# Altium PCB PCB_tms320f28069.pcbdoc (part 2 of 2)
Units mil, origin at the board's own origin, x right, y up, seen from the top; angles counter-clockwise.
Board outline 7604.36 x 4553.97 mil, 2 copper layers (Top Layer, Bottom Layer); 149 components, 214 nets, 843 pads, 168 vias.
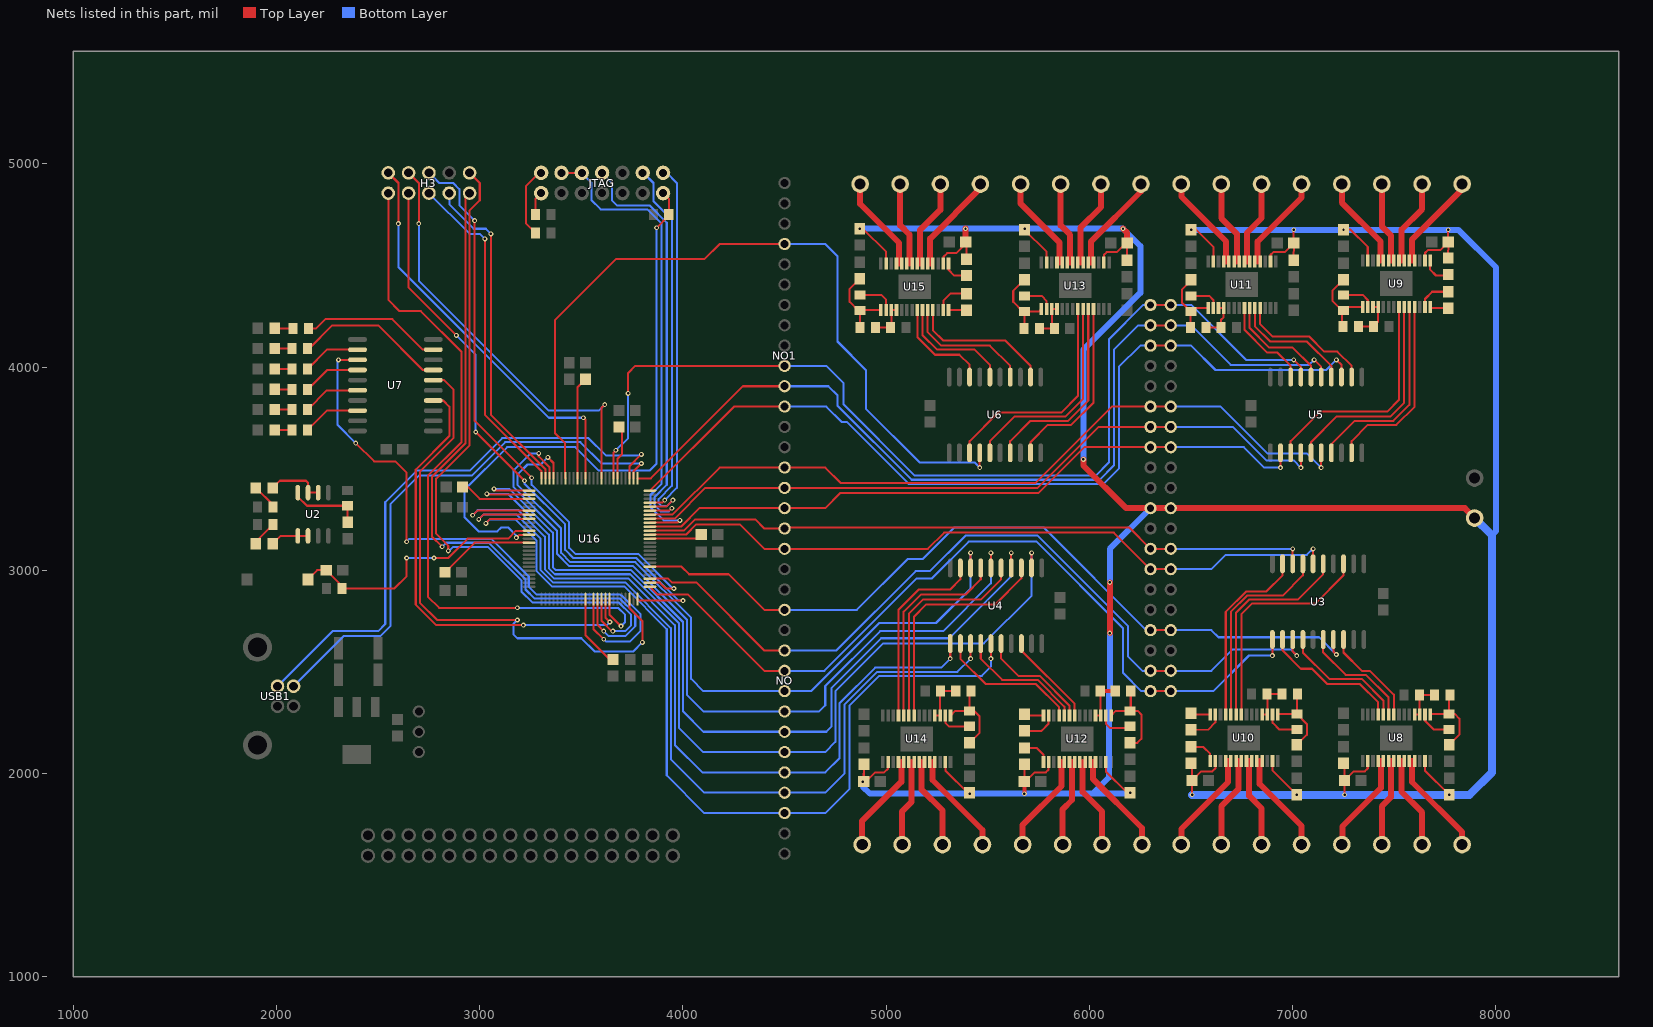
[diagram p2: the nets of this part, all layers, seen from the top]

## Via types
v1: diameter 24, hole 12, Top Layer to Bottom Layer, tented both sides, 168 vias

## Nets (pads, with @x,y where several pads share a name; then routed paths per layer and width w, separated by ;. In a path a pad name is that pad's centre, name@x,y a point inside that pad or via, vN(x,y) a via of type N, cw(c..) or ccw(c..) an arc to the next point about the centre after c; other vN are vias at no path point) (continued)
GPIO17: H3.6 U16.52 | length 2899.2
  Top Layer w10: v1(2975.16,4720.67) 2975.16,3735.67 v1(3255.16,3455.67) ; U16.52@3837.4,2939.13 3886.7,2939.13 3915.16,2910.67 v1(3955.16,2910.67)
  Bottom Layer w10: H3.6@2750.16,4955.67 2800.16,4905.67 2870.16,4905.67 2900.16,4875.67 2900.16,4795.67 v1(2975.16,4720.67) ; v1(3255.16,3455.67) 3255.16,3420.67 3440.16,3235.67 3440.16,3110.67 3470.16,3080.67 3780.16,3080.67 3950.16,2910.67 v1(3955.16,2910.67)
GPIO18: NO.8 pad.22 pad.32 U3.11 U16.51 | length 4081.8
  Top Layer w10: U16.51@3837.36,2919.47 3876.16,2880.67 4025.16,2880.67 4400.16,2505.67 NO.8@4500.16,2505.67 ; pad.22@6300.16,2405.67 pad.32@6400.16,2405.67 ; v1(6900.16,2580.67) U3.11@6900.16,2659.45
  Bottom Layer w10: NO.8@4500.16,2505.67 4695.16,2505.67 5150.16,2960.67 5225.16,2960.67 5405.16,3140.67 5740.16,3140.67 6165.16,2715.67 6165.16,2495.67 6255.16,2405.67 pad.22@6300.16,2405.67 ; pad.32@6400.16,2405.67 6610.16,2405.67 6785.16,2580.67 v1(6900.16,2580.67)
GPIO19: NO.2 pad.17 pad.38 U3.6 U16.64 | length 3556.2
  Top Layer w10: U16.64@3837.36,3175.37 4014.86,3175.37 4065.16,3225.67 4280.16,3225.67 4400.16,3105.67 NO.2@4500.16,3105.67 5205.16,3105.67 5285.16,3185.67 6120.16,3185.67 pad.17@6300.16,3005.67 pad.38@6400.16,3005.67 ; U3.6@7100.16,3031.89 v1(7100.16,3105.67)
  Bottom Layer w10: pad.38@6400.16,3005.67 6600.16,3005.67 6670.16,3075.67 7070.16,3075.67 v1(7100.16,3105.67)
GPIO20: NO.13 U4.11 U16.6 | length 4105.1
  Top Layer w10: v1(2965.16,3270.67) 2987.96,3293.47 U16.6@3242.92,3293.47 ; v1(5315.16,2565.67) U4.11@5315.16,2659.45
  Bottom Layer w10: v1(2965.16,3270.67) 2990.16,3295.67 3190.16,3295.67 3320.16,3165.67 3320.16,3005.67 3365.16,2960.67 3730.16,2960.67 3960.16,2730.67 3960.16,2140.67 4095.16,2005.67 NO.13@4500.16,2005.67 4700.16,2005.67 4770.16,2075.67 4770.16,2345.67 4945.16,2520.67 5270.16,2520.67 v1(5315.16,2565.67)
GPIO21: NO.14 U4.13 U16.7 | length 4290.1
  Top Layer w10: v1(2995.16,3250.67) 3018.27,3273.78 U16.7@3242.92,3273.78 ; v1(5415.16,2565.67) U4.13@5415.16,2659.45
  Bottom Layer w10: v1(2995.16,3250.67) 3020.16,3275.67 3180.16,3275.67 3300.16,3155.67 3300.16,3000.67 3360.16,2940.67 3715.16,2940.67 3940.16,2715.67 3940.16,2070.67 4105.16,1905.67 NO.14@4500.16,1905.67 4700.16,1905.67 4795.16,2000.67 4795.16,2340.67 4955.16,2500.67 5350.16,2500.67 v1(5415.16,2565.67)
GPIO22: NO.10 U4.6 U16.98 | length 4017.2
  Top Layer w10: v1(3290.16,3575.67) 3290.16,3560.67 3343.3,3507.52 U16.98@3343.31,3452.91 ; U4.6@5515.16,3011.89 v1(5515.16,3085.67)
  Bottom Layer w10: v1(3290.16,3575.67) 3250.16,3575.67 3165.16,3490.67 3165.16,3410.67 3380.16,3195.67 3380.16,3080.67 3440.16,3020.67 3755.16,3020.67 4020.16,2755.67 4020.16,2385.67 4100.16,2305.67 NO.10@4500.16,2305.67 4670.16,2305.67 4700.16,2335.67 4700.16,2430.67 4970.16,2700.67 5280.16,2700.67 5515.16,2935.67 v1(5515.16,3085.67)
GPIO23: NO.12 U4.2 U16.2 | length 4542.7
  Top Layer w10: v1(3035.16,3375.67) 3038.61,3372.21 U16.2@3242.92,3372.21 ; U4.2@5715.16,3031.89 v1(5715.16,3085.67)
  Bottom Layer w10: v1(3035.16,3375.67) 3140.16,3375.67 3340.16,3175.67 3340.16,3010.67 3370.16,2980.67 3740.16,2980.67 3980.16,2740.67 3980.16,2225.67 4100.16,2105.67 NO.12@4500.16,2105.67 4700.16,2105.67 4750.16,2155.67 4750.16,2405.67 4985.16,2640.67 5480.16,2640.67 5715.16,2875.67 v1(5715.16,3085.67)
GPIO24: NO.9 U4.8 U16.97 | length 3703.9
  Top Layer w10: v1(3335.16,3555.67) 3362.96,3527.87 U16.97@3362.99,3452.91 ; U4.8@5415.16,3011.89 v1(5415.16,3085.67)
  Bottom Layer w10: v1(3335.16,3555.67) 3300.16,3520.67 3235.16,3520.67 3185.16,3470.67 3185.16,3420.67 3400.16,3205.67 3400.16,3085.67 3445.16,3040.67 3765.16,3040.67 4040.16,2765.67 4040.16,2465.67 4100.16,2405.67 NO.9@4500.16,2405.67 4630.16,2405.67 4965.16,2740.67 5245.16,2740.67 5415.16,2910.67 v1(5415.16,3085.67)
GPIO25: U7.13 U16.39 | length 3039.6
  Top Layer w10: v1(2305.16,4035.67) U7.13@2398.94,4035.67 ; v1(2390.16,3625.67) 2480.16,3535.67 2585.16,3535.67 2640.16,3480.67 v1(2640.16,3140.67) ; U16.39@3559.85,2858.43 3559.85,2710.98 v1(3610.16,2660.67)
  Bottom Layer w10: v1(2305.16,4035.67) 2300.16,4030.67 2300.16,3715.67 v1(2390.16,3625.67) ; v1(2640.16,3140.67) 2654.16,3154.67 3056.16,3154.67 3241.16,2969.67 3241.16,2919.67 3280.16,2880.67 3690.76,2880.67 3695.76,2875.67 3700.16,2875.67 3790.16,2785.67 3790.16,2700.67 3740.16,2650.67 3620.16,2650.67 v1(3610.16,2660.67)
GPIO28: H3.3 U16.50 | length 2988.3
  Top Layer w10: H3.3@2650.16,4855.67 2650.16,4390.67 v1(2885.16,4155.67) ; v1(2980.16,3680.67) v1(3220.16,3440.67) ; U16.50@3776.38,2858.43 3776.38,2851.89 3777.6,2850.67 v1(4000.16,2850.67)
  Bottom Layer w10: v1(2885.16,4155.67) 2980.16,4060.67 v1(2980.16,3680.67) ; v1(3220.16,3440.67) 3220.16,3425.67 3420.16,3225.67 3420.16,3100.67 3460.16,3060.67 3770.16,3060.67 3980.16,2850.67 v1(4000.16,2850.67)
GPIO29: H3.1 U16.43 | length 3490.7
  Top Layer w10: H3.1@2550.16,4855.67 2550.16,4330.67 2605.16,4275.67 2710.16,4275.67 2910.16,4075.67 2910.16,3630.67 2745.16,3465.67 2745.16,2870.67 2800.16,2815.67 v1(3185.16,2815.67) ; U16.43@3638.59,2858.43 3638.59,2782.24 v1(3695.16,2725.67)
  Bottom Layer w10: v1(3185.16,2815.67) 3680.16,2815.67 3715.16,2780.67 3715.16,2745.67 v1(3695.16,2725.67)
GPIO30: H3.10 U16.41 | length 3410.2
  Top Layer w10: v1(2845.16,3095.67) 2845.16,3120.67 2785.16,3180.67 2785.16,3450.67 2950.16,3615.67 2950.16,4770.67 3000.16,4820.67 3000.16,4905.67 H3.10@2950.16,4955.67 ; U16.41@3599.26,2858.47 3599.26,2751.57 3650.16,2700.67 v1(3655.16,2700.67)
  Bottom Layer w10: v1(2845.16,3095.67) 2850.16,3095.67 2870.16,3115.67 3040.16,3115.67 3205.16,2950.67 3205.16,2895.67 3260.16,2840.67 3685.16,2840.67 3745.16,2780.67 3745.16,2730.67 3715.16,2700.67 v1(3655.16,2700.67)
GPIO31: H3.9 U16.40 | length 3386.4
  Top Layer w10: v1(2815.16,3115.67) 2765.16,3165.67 2765.16,3460.67 2930.16,3625.67 2930.16,4835.67 H3.9@2950.16,4855.67 ; U16.40@3579.53,2858.43 3579.53,2731.3 v1(3610.16,2700.67)
  Bottom Layer w10: v1(2815.16,3115.67) 2835.06,3135.67 3045.16,3135.67 3225.16,2955.67 3225.16,2905.67 3270.16,2860.67 3690.16,2860.67 3765.16,2785.67 3765.16,2725.67 3715.16,2675.67 3635.16,2675.67 v1(3610.16,2700.67)
GPIO32: H3.7 U16.99 | length 1634.1
  Top Layer w10: v1(3055.16,4655.67) 3055.16,3765.67 3323.66,3497.17 U16.99@3323.66,3452.87
  Bottom Layer w10: H3.7@2850.16,4855.67 2850.16,4800.67 2970.16,4680.67 3030.16,4680.67 v1(3055.16,4655.67)
GPIO33: H3.5 U16.100 | length 1661.5
  Top Layer w10: v1(3025.16,4630.67) 3025.16,3765.67 3303.96,3486.87 U16.100@3303.96,3452.87
  Bottom Layer w10: H3.5@2750.16,4855.67 2950.16,4655.67 3000.16,4655.67 v1(3025.16,4630.67)
GPIO34: NO1.15 pad.9 pad.30 U5.4 U16.68 | length 3545.4
  Top Layer w10: U16.68@3837.4,3254.1 3958.56,3254.07 4110.16,3405.67 NO1.15@4500.16,3405.67 5745.16,3405.67 6045.16,3705.67 pad.9@6300.16,3705.67 pad.30@6400.16,3705.67 ; v1(7040.16,3505.67) U5.4@7040.16,3578.39
  Bottom Layer w10: pad.30@6400.16,3705.67 6705.16,3705.67 6870.16,3540.67 7005.16,3540.67 v1(7040.16,3505.67)
GPIO39: NO1.16 pad.10 pad.31 U5.2 U16.66 | length 3378.8
  Top Layer w10: U16.66@3837.4,3214.73 3990.16,3214.73 4081.1,3305.67 NO1.16@4500.16,3305.67 4700.16,3305.67 4775.16,3380.67 5750.16,3380.67 5975.16,3605.67 pad.10@6300.16,3605.67 pad.31@6400.16,3605.67 ; v1(6940.16,3505.67) U5.2@6940.16,3578.39
  Bottom Layer w10: pad.31@6400.16,3605.67 6760.16,3605.67 6860.16,3505.67 v1(6940.16,3505.67)
GPIO40: NO1.9 pad.11 pad.24 U5.17 U16.82 | length 5035.7
  Top Layer w10: U16.82@3658.27,3452.91 3658.27,3578.78 v1(3670.16,3590.67) ; v1(3730.16,3870.67) 3730.16,3970.67 3765.16,4005.67 NO1.9@4500.16,4005.67 ; pad.11@6300.16,4305.67 pad.24@6400.16,4305.67 ; v1(7005.16,4035.67) 7040.16,4000.67 U5.17@7040.16,3950.83
  Bottom Layer w10: v1(3670.16,3590.67) 3730.16,3650.67 v1(3730.16,3870.67) ; NO1.9@4500.16,4005.67 4705.16,4005.67 4790.16,3920.67 4790.16,3815.67 5140.16,3465.67 6030.16,3465.67 6095.16,3530.67 6095.16,4135.67 6265.16,4305.67 pad.11@6300.16,4305.67 ; pad.24@6400.16,4305.67 6500.16,4305.67 6770.16,4035.67 v1(7005.16,4035.67)
GPIO41: NO1.10 pad.12 pad.25 U5.15 U16.76 | length 4575.3
  Top Layer w10: U16.76@3776.38,3452.91 3842.36,3452.87 4295.16,3905.67 NO1.10@4500.16,3905.67 ; pad.12@6300.16,4205.67 pad.25@6400.16,4205.67 ; v1(7105.16,4035.67) 7140.16,4000.67 U5.15@7140.16,3950.83
  Bottom Layer w10: NO1.10@4500.16,3905.67 4715.16,3905.67 4760.16,3860.67 4760.16,3810.67 5125.16,3445.67 6050.16,3445.67 6120.16,3515.67 6120.16,4085.67 6240.16,4205.67 pad.12@6300.16,4205.67 ; pad.25@6400.16,4205.67 6500.16,4205.67 6695.16,4010.67 7080.16,4010.67 v1(7105.16,4035.67)
GPIO42: NO.11 U4.4 U16.1 | length 4190.7
  Top Layer w10: v1(3070.16,3400.67) 3078.93,3391.89 U16.1@3242.92,3391.89 ; U4.4@5615.16,3011.89 v1(5615.16,3085.67)
  Bottom Layer w10: v1(3070.16,3400.67) 3145.16,3400.67 3360.16,3185.67 3360.16,3015.67 3375.16,3000.67 3745.16,3000.67 4000.16,2745.67 4000.16,2305.67 4100.16,2205.67 NO.11@4500.16,2205.67 4705.16,2205.67 4730.16,2230.67 4730.16,2420.67 4975.16,2665.67 5310.16,2665.67 5615.16,2970.67 v1(5615.16,3085.67)
GPIO43: NO.15 U4.15 U16.8 | length 4493.6
  Top Layer w10: v1(3030.16,3230.67) 3052.36,3252.87 U16.8@3240.91,3252.87 ; v1@5515.16,2566.89 U4.15@5515.16,2660.67
  Bottom Layer w10: v1(3030.16,3230.67) 3050.16,3250.67 3175.16,3250.67 3280.16,3145.67 3280.16,2995.67 3355.16,2920.67 3710.16,2920.67 3920.16,2710.67 3920.16,1990.67 4105.16,1805.67 NO.15@4500.16,1805.67 4700.16,1805.67 4820.16,1925.67 4820.16,2335.67 4965.16,2480.67 5470.16,2480.67 5515.16,2525.67 v1(5515.16,2565.67)
GPIO44: NO.5 pad.19 pad.35 U3.17 U16.56 | length 3972.3
  Top Layer w10: U16.56@3837.4,3017.87 3992.96,3017.87 4030.16,2980.67 4225.16,2980.67 4400.16,2805.67 NO.5@4500.16,2805.67 ; pad.19@6300.16,2705.67 pad.35@6400.16,2705.67 ; U3.17@7200.16,2659.45 7200.16,2600.67 v1(7215.16,2585.67)
  Bottom Layer w10: NO.5@4500.16,2805.67 4855.16,2805.67 5105.16,3055.67 5180.16,3055.67 5335.16,3210.67 5775.16,3210.67 6280.16,2705.67 pad.19@6300.16,2705.67 ; pad.35@6400.16,2705.67 6600.16,2705.67 6635.16,2670.67 7130.16,2670.67 v1(7215.16,2585.67)
GPIO50: U7.4 U16.42 | length 2258.8
  Top Layer w10: U7.4@2771.38,3835.67 2820.16,3835.67 2850.16,3805.67 2850.16,3660.67 2685.16,3495.67 2685.16,2830.67 2785.16,2730.67 v1(3215.16,2730.67) ; U16.42@3618.9,2858.43 3618.9,2766.93 v1(3640.16,2745.67)
  Bottom Layer w10: v1(3215.16,2730.67) 3625.16,2730.67 v1(3640.16,2745.67)
GPIO51: U7.6 U16.48 | length 2757.1
  Top Layer w10: U7.6@2771.38,3935.67 2825.16,3935.67 2870.16,3890.67 2870.16,3650.67 2705.16,3485.67 2705.16,2840.67 2790.16,2755.67 v1(3185.16,2755.67) ; U16.48@3737.05,2858.47 3737.05,2813.77 3800.16,2750.67 v1(3800.16,2645.67)
  Bottom Layer w10: v1(3185.16,2755.67) 3165.16,2735.67 3165.16,2685.67 3185.16,2665.67 3500.16,2665.67 3565.16,2600.67 3755.16,2600.67 v1(3800.16,2645.67)
GPIO52: NO.7 pad.21 pad.33 U3.13 U16.53 | length 4069.4
  Top Layer w10: U16.53@3837.4,2958.82 3927.06,2958.77 3945.16,2940.67 4065.16,2940.67 4400.16,2605.67 NO.7@4500.16,2605.67 ; pad.21@6300.16,2505.67 pad.33@6400.16,2505.67 ; U3.13@7000.16,2659.45 7000.16,2600.67 v1(7020.16,2580.67)
  Bottom Layer w10: NO.7@4500.16,2605.67 4755.16,2605.67 5145.16,2995.67 5215.16,2995.67 5390.16,3170.67 5745.16,3170.67 6190.16,2725.67 6190.16,2575.67 6260.16,2505.67 pad.21@6300.16,2505.67 ; pad.33@6400.16,2505.67 6600.16,2505.67 6705.16,2610.67 6990.16,2610.67 v1(7020.16,2580.67)
GPIO53: NO.1 pad.18 pad.39 U3.8 U16.65 | length 3326.7
  Top Layer w10: U16.65@3837.36,3195.07 4004.56,3195.07 4060.16,3250.67 4355.16,3250.67 4400.16,3205.67 NO.1@4500.16,3205.67 4500.16,3210.67 6195.16,3210.67 pad.18@6300.16,3105.67 pad.39@6400.16,3105.67 ; U3.8@7000.16,3031.89 v1(7000.16,3105.67)
  Bottom Layer w10: pad.39@6400.16,3105.67 v1(7000.16,3105.67)
GPIO54: NO1.14 pad.8 pad.29 U5.6 U16.69 | length 3782.2
  Top Layer w10: U16.69@3837.4,3273.78 3948.26,3273.77 4180.16,3505.67 NO1.14@4500.16,3505.67 4700.16,3505.67 4775.16,3430.67 5735.16,3430.67 6110.16,3805.67 pad.8@6300.16,3805.67 pad.29@6400.16,3805.67 ; v1(7140.16,3505.67) U5.6@7140.16,3578.39
  Bottom Layer w10: pad.29@6400.16,3805.67 6645.16,3805.67 6875.16,3575.67 7070.16,3575.67 v1(7140.16,3505.67)
GPIO55: NO1.11 pad.13 pad.26 U5.13 U16.75 | length 4446.8
  Top Layer w10: U16.75@3837.4,3391.89 4251.16,3805.67 NO1.11@4500.16,3805.67 ; pad.13@6300.16,4105.67 pad.26@6400.16,4105.67 ; v1(7215.16,4035.67) 7240.16,4010.67 U5.13@7240.16,3950.83
  Bottom Layer w10: NO1.11@4500.16,3805.67 4705.16,3805.67 4780.16,3730.67 4805.16,3730.67 5110.16,3425.67 6070.16,3425.67 6145.16,3500.67 6145.16,4000.67 6250.16,4105.67 pad.13@6300.16,4105.67 ; pad.26@6400.16,4105.67 6500.16,4105.67 6620.16,3985.67 7165.16,3985.67 v1(7215.16,4035.67)
GPIO56: H3.4 U16.85 | length 2112.6
  Top Layer w10: H3.4@2650.16,4955.67 2700.16,4905.67 v1(2700.16,4705.67) ; U16.85@3599.22,3452.91 3599.21,3799.73 v1(3615.16,3815.67)
  Bottom Layer w10: v1(2700.16,4705.67) 2700.16,4425.67 3340.16,3785.67 3585.16,3785.67 v1(3615.16,3815.67)
GPIO57: H3.2 U16.89 | length 2004.3
  Top Layer w10: H3.2@2550.16,4955.67 2600.16,4905.67 v1(2600.16,4705.67) ; v1(3510.16,3750.67) 3520.48,3740.35 U16.89@3520.48,3452.91
  Bottom Layer w10: v1(2600.16,4705.67) 2600.16,4490.67 3340.16,3750.67 v1(3510.16,3750.67)
GPIO58: NO1.3 U6.4 U16.94 | length 3930.3
  Top Layer w10: U16.94@3422.06,3452.87 3420.16,3454.77 3420.16,3625.67 3370.16,3675.67 3370.16,4230.67 3670.16,4530.67 4105.16,4530.67 4180.16,4605.67 NO1.3@4500.16,4605.67 ; v1(5460.16,3505.67) U6.4@5460.16,3578.39
  Bottom Layer w10: NO1.3@4500.16,4605.67 4700.16,4605.67 4760.16,4545.67 4760.16,4125.67 4900.16,3985.67 4900.16,3795.67 5165.16,3530.67 5435.16,3530.67 v1(5460.16,3505.67)
LED1_2: LED1.2 R2.2 | length 130
  Top Layer w10: LED1.2@1898.81,3405.67 1983.2,3321.28 R2.2@1983.2,3310.67
LED2_2: LED2.2 R3.2 | length 130
  Top Layer w10: LED2.2@1898.81,3130.67 1898.81,3141.28 R3.2@1983.2,3225.67
LED3_1: LED3.1 R7.1 | length 85.6
  Top Layer w10: LED3.1@1991.51,3690.67 R7.1@2077.11,3690.67
LED4_1: LED4.1 R8.1 | length 85.6
  Top Layer w10: LED4.1@1991.51,3790.67 R8.1@2077.11,3790.67
LED5_1: LED5.1 R11.1 | length 86
  Top Layer w10: LED5.1@1991.51,3890.67 1992.51,3889.67 R11.1@2077.11,3889.67
LED7_1: LED7.1 R14.1 | length 85.6
  Top Layer w10: LED7.1@1991.51,3990.67 R14.1@2077.11,3990.67
M1_AIN1: U3.12 U8.25 | length 690.4
  Top Layer w10: U3.12@6950.16,2659.45 6950.16,2605.67 7040.16,2515.67 7095.16,2515.67 7170.16,2440.67 7330.16,2440.67 7420.59,2350.24 U8.25@7420.59,2289.84
M1_AIN2: U3.14 U8.24 | length 627.4
  Top Layer w10: U3.14@7050.16,2659.45 7050.16,2595.67 7180.16,2465.67 7340.16,2465.67 7446.18,2359.65 U8.24@7446.18,2289.84
M1_AOUT1: ST1.1 U8.4 U8.5 | length 515.9
  Top Layer w10: U8.4@7420.59,2061.5 U8.5@7446.18,2061.5
  Top Layer w29.53: ST1.1@7241.76,1650.67 7245.16,1654.07 7245.16,1740.67 7433.66,1929.17 7433.66,2061.47
M1_AOUT2: ST1.2 U8.6 U8.7 | length 455.5
  Top Layer w10: U8.6@7471.77,2061.5 U8.7@7497.36,2061.5
  Top Layer w29.53: ST1.2@7438.58,1650.67 7438.56,1839.07 7484.66,1885.17 7484.66,2061.47
M1_BIN1: U3.16 U8.23 | length 561.4
  Top Layer w10: U3.16@7150.16,2659.45 7150.16,2595.67 7260.16,2485.67 7360.16,2485.67 7471.78,2374.05 U8.23@7471.77,2289.84
M1_BIN2: U3.18 U8.22 | length 495.4
  Top Layer w10: U3.18@7250.16,2659.47 7250.16,2595.67 7340.16,2505.67 7380.16,2505.67 7497.36,2388.47 U8.22@7497.36,2289.87
M1_BOUT1: ST2.2 U8.10 U8.11 | length 538.5
  Top Layer w10: U8.10@7574.13,2061.5 U8.11@7599.72,2061.5
  Top Layer w29.53: 7587.16,2061.47 7587.16,1958.67 7833.56,1712.27 ST2.2@7833.58,1650.67
M1_BOUT2: ST2.1 U8.8 U8.9 | length 478.5
  Top Layer w10: U8.8@7522.95,2061.5 U8.9@7548.54,2061.5
  Top Layer w29.53: 7535.16,2061.47 7535.16,1910.67 7636.76,1809.07 ST2.1@7636.76,1650.67
M1_DVDD: C34.1 R15.2 R17.2 U8.15 | length 398.2
  Top Layer w10: U8.15@7676.49,2289.84 7680.37,2293.71 R17.2@7770.16,2293.71 ; C34.1@7770.16,2141.22 7820.16,2191.22 7820.16,2270.67 7797.12,2293.71 R17.2@7770.16,2293.71 ; R15.2@7773.2,2385.67 7770.16,2382.63 R17.2@7770.16,2293.71
M1_NFAULT: R17.1 U8.16 | length 168.3
  Top Layer w10: U8.16@7650.9,2289.84 7650.91,2259.92 7695.16,2215.67 7697.12,2217.63 R17.1@7770.16,2217.63
M2_AIN1: U3.9 U10.25 | length 915.9
  Top Layer w10: U10.25@6670.59,2289.84 6670.59,2795.24 6771.02,2895.67 6870.16,2895.67 6950.16,2975.67 U3.9@6950.16,3031.89
M2_AIN2: U3.7 U10.24 | length 991.2
  Top Layer w10: U10.24@6696.18,2289.84 6696.18,2796.69 6775.16,2875.67 6950.16,2875.67 7050.16,2975.67 U3.7@7050.16,3031.89
M2_AOUT1: ST4.1 U10.4 U10.5 | length 532.1
  Top Layer w10: U10.4@6670.59,2061.5 U10.5@6696.18,2061.5
  Top Layer w29.53: ST4.1@6451.76,1650.67 6451.76,1727.27 6682.76,1958.27 6682.76,2061.47
M2_AOUT2: ST4.2 U10.6 U10.7 | length 471.7
  Top Layer w10: U10.6@6721.77,2061.5 U10.7@6747.36,2061.5
  Top Layer w29.53: ST4.2@6648.58,1650.67 6648.56,1839.07 6733.86,1924.37 6733.86,2061.47
M2_BIN1: U3.5 U10.23 | length 1060.1
  Top Layer w10: U10.23@6721.77,2289.84 6721.78,2792.29 6785.16,2855.67 7025.16,2855.67 7150.16,2980.67 U3.5@7150.16,3031.89
M2_BIN2: U3.3 U10.22 | length 1132.2
  Top Layer w10: U10.22@6747.36,2289.84 6747.37,2783.46 6799.58,2835.67 7110.16,2835.67 7250.16,2975.67 U3.3@7250.16,3031.89
M2_BOUT1: ST3.2 U10.10 U10.11 | length 521.9
  Top Layer w10: U10.10@6824.13,2061.5 U10.11@6849.72,2061.5
  Top Layer w29.53: 6837.16,2061.47 6837.16,1948.67 7043.56,1742.27 ST3.2@7043.58,1650.67
M2_BOUT2: ST3.1 U10.8 U10.9 | length 461.8
  Top Layer w10: U10.8@6772.95,2061.5 U10.9@6798.54,2061.5
  Top Layer w29.53: 6785.46,2061.47 6785.46,1890.37 6846.76,1829.07 ST3.1@6846.76,1650.67
M2_DVDD: C44.1 R21.2 R23.2 U10.15 | length 387.6
  Top Layer w10: U10.15@6926.49,2289.84 6930.37,2293.71 R23.2@7020.16,2293.71 7020.16,2387.63 R21.2@7023.2,2390.67 ; C44.1@7020.16,2141.22 7070.16,2190.67 7070.16,2243.67 R23.2@7020.16,2293.71
M2_NFAULT: R23.1 U10.16 | length 174.2
  Top Layer w10: U10.16@6900.9,2289.84 6900.91,2249.92 6935.16,2215.67 6937.12,2217.63 R23.1@7020.16,2217.63
M3_AIN1: U4.12 U12.25 | length 719.2
  Top Layer w10: U4.12@5365.16,2659.47 5365.16,2565.67 5490.16,2440.67 5735.16,2440.67 5850.56,2325.27 U12.25@5850.56,2284.87
M3_AIN2: U4.14 U12.24 | length 647.4
  Top Layer w10: U4.14@5465.16,2659.47 5465.16,2565.67 5570.16,2460.67 5745.16,2460.67 5876.16,2329.67 U12.24@5876.16,2284.87
M3_AOUT1: ST6.1 U12.4 U12.5 | length 510.5
  Top Layer w10: U12.4@5850.59,2056.5 U12.5@5876.18,2056.5
  Top Layer w29.53: ST6.1@5671.76,1650.67 5671.76,1747.27 5862.76,1938.27 5862.76,2056.47
M3_AOUT2: ST6.2 U12.6 U12.7 | length 450.3
  Top Layer w10: U12.6@5901.77,2056.5 U12.7@5927.36,2056.5
  Top Layer w29.53: ST6.2@5868.58,1650.67 5868.56,1824.07 5914.16,1869.67 5914.16,2056.47
M3_BIN1: U4.16 U12.23 | length 575.5
  Top Layer w10: U4.16@5565.16,2659.47 5565.16,2565.67 5650.16,2480.67 5755.16,2480.67 5901.76,2334.07 U12.23@5901.76,2284.87
M3_BIN2: U4.18 U12.22 | length 483.2
  Top Layer w10: U4.18@5665.16,2659.47 5665.16,2605.67 5927.36,2343.47 U12.22@5927.36,2284.87
M3_BOUT1: ST5.2 U12.10 U12.11 | length 531.4
  Top Layer w10: U12.10@6004.13,2056.5 U12.11@6029.72,2056.5
  Top Layer w29.53: 6017.06,2056.47 6017.06,1973.77 6258.56,1732.27 ST5.2@6258.58,1650.67
M3_BOUT2: ST5.1 U12.8 U12.9 | length 471.2
  Top Layer w10: U12.8@5952.95,2056.5 U12.9@5978.54,2056.5
  Top Layer w29.53: 5965.66,2056.47 5965.66,1910.17 6061.76,1814.07 ST5.1@6061.76,1650.67
M3_DVDD: C54.1 R27.2 R29.2 U12.15 | length 447.3
  Top Layer w10: U12.15@6106.49,2284.84 6130.37,2308.71 R29.2@6200.16,2308.71 6203.2,2311.75 R27.2@6203.2,2405.67 ; C54.1@6200.16,2151.22 6235.66,2151.17 6255.16,2170.67 6255.16,2290.67 6237.16,2308.67 R29.2@6200.16,2308.71
M3_NFAULT: R29.1 U12.16 | length 177.7
  Top Layer w10: U12.16@6080.96,2284.87 6080.96,2244.87 6102.66,2223.17 6200.16,2223.17 R29.1@6200.16,2232.67
M4_AIN1: U4.9 U14.25 | length 964
  Top Layer w10: U14.25@5060.56,2284.87 5060.56,2806.07 5160.16,2905.67 5315.16,2905.67 5365.16,2955.67 U4.9@5365.16,3031.87
M4_AIN2: U4.7 U14.24 | length 1032.9
  Top Layer w10: U14.24@5086.16,2284.87 5086.16,2796.67 5170.16,2880.67 5390.16,2880.67 5465.16,2955.67 U4.7@5465.16,3031.87
M4_AOUT1: ST8.1 U14.4 U14.5 | length 511
  Top Layer w10: U14.4@5060.59,2056.5 U14.5@5086.18,2056.5
  Top Layer w29.53: ST8.1@4881.76,1650.67 4881.76,1767.27 5074.06,1959.57 5074.06,2056.47
M4_AOUT2: ST8.2 U14.6 U14.7 | length 450.9
  Top Layer w10: U14.6@5111.77,2056.5 U14.7@5137.36,2056.5
  Top Layer w29.53: ST8.2@5078.58,1650.67 5078.56,1814.07 5125.56,1861.07 5125.56,2056.47
M4_BIN1: U4.5 U14.23 | length 1101.8
  Top Layer w10: U14.23@5111.76,2284.87 5111.76,2787.27 5180.16,2855.67 5465.16,2855.67 5565.16,2955.67 U4.5@5565.16,3031.87
M4_BIN2: U4.3 U14.22 | length 1164.8
  Top Layer w10: U14.22@5137.36,2284.87 5137.36,2772.87 5195.16,2830.67 5535.16,2830.67 5665.16,2960.67 U4.3@5665.16,3031.87
M4_BOUT1: ST7.2 U14.10 U14.11 | length 533.2
  Top Layer w10: U14.10@5214.13,2056.5 U14.11@5239.72,2056.5
  Top Layer w29.53: 5227.66,2056.47 5227.66,1968.17 5473.56,1722.27 ST7.2@5473.58,1650.67
M4_BOUT2: ST7.1 U14.8 U14.9 | length 473.6
  Top Layer w10: U14.8@5162.95,2056.5 U14.9@5188.54,2056.5
  Top Layer w29.53: 5174.86,2056.47 5174.86,1920.97 5276.76,1819.07 ST7.1@5276.76,1650.67
M4_DVDD: C64.1 R33.2 R35.2 U14.15 | length 415.6
  Top Layer w10: U14.15@5316.49,2284.84 5340.37,2308.71 R35.2@5410.16,2308.71 ; C64.1@5410.16,2151.22 5460.16,2201.22 5460.16,2280.67 5432.12,2308.71 R35.2@5410.16,2308.71 ; R33.2@5418.2,2405.67 5410.16,2397.63 R35.2@5410.16,2308.71
M4_NFAULT: R35.1 U14.16 | length 163
  Top Layer w10: U14.16@5290.9,2284.84 5290.91,2249.92 5310.16,2230.67 5408.2,2230.67 R35.1@5410.16,2232.63
M5_AIN1: U5.3 U9.22 | length 1132.1
  Top Layer w10: U5.3@6990.16,3578.39 6990.16,3635.67 7135.16,3780.67 7465.16,3780.67 7522.96,3838.47 U9.22@7522.95,4296.5
M5_AIN2: U5.5 U9.23 | length 1063.2
  Top Layer w10: U5.5@7090.16,3578.39 7090.16,3630.67 7215.16,3755.67 7480.16,3755.67 7548.56,3824.07 U9.23@7548.56,4296.47
M5_AOUT1: ST10.1 U9.4 U9.5 | length 503.6
  Top Layer w10: U9.5@7574.13,4524.84 U9.4@7599.72,4524.84
  Top Layer w29.53: 7586.76,4524.87 7586.76,4627.27 7833.56,4874.07 ST10.1@7833.58,4900.67
M5_AOUT2: ST10.2 U9.6 U9.7 | length 443.4
  Top Layer w10: U9.7@7522.95,4524.84 U9.6@7548.54,4524.84
  Top Layer w29.53: 7535.26,4524.87 7535.26,4675.77 7636.76,4777.27 ST10.2@7636.76,4900.67
M5_BIN1: U5.7 U9.24 | length 988.5
  Top Layer w10: U5.7@7190.16,3578.39 7190.16,3620.67 7305.16,3735.67 7495.16,3735.67 7574.16,3814.67 U9.24@7574.16,4296.47
M5_BIN2: U5.9 U9.25 | length 928.4
  Top Layer w10: U5.9@7290.16,3578.39 7290.16,3635.67 7370.16,3715.67 7510.16,3715.67 7599.76,3805.27 U9.25@7599.76,4296.47
M5_BOUT1: ST9.2 U9.10 U9.11 | length 480.6
  Top Layer w10: U9.11@7420.59,4524.84 U9.10@7446.18,4524.84
  Top Layer w29.53: ST9.2@7241.76,4900.67 7241.76,4809.07 7432.96,4617.87 7432.96,4524.87
M5_BOUT2: ST9.1 U9.8 U9.9 | length 420.4
  Top Layer w10: U9.9@7471.77,4524.84 U9.8@7497.36,4524.84
  Top Layer w29.53: ST9.1@7438.58,4900.67 7438.56,4692.27 7484.36,4646.47 7484.36,4524.87
M5_DVDD: C35.1 R16.2 R18.2 U9.15 | length 383.9
  Top Layer w10: R16.2@7242.12,4200.67 7242.12,4269.59 R18.2@7250.16,4277.63 ; C35.1@7250.16,4430.12 7195.16,4375.12 7195.16,4325.67 7243.2,4277.63 R18.2@7250.16,4277.63 ; U9.15@7343.82,4296.5 7269.03,4296.5 R18.2@7250.16,4277.63
M5_NFAULT: R18.1 U9.16 | length 164.6
  Top Layer w10: R18.1@7250.16,4353.71 7252.16,4355.67 7345.16,4355.67 7369.36,4329.97 U9.16@7369.41,4296.5
M6_AIN1: U5.18 U11.22 | length 464
  Top Layer w10: U11.22@6762.95,4291.5 6762.96,4182.87 6875.16,4070.67 6925.16,4070.67 6990.16,4005.67 U5.18@6990.16,3950.87
M6_AIN2: U5.16 U11.23 | length 532.9
  Top Layer w10: U11.23@6788.56,4291.47 6788.56,4192.27 6885.16,4095.67 7000.16,4095.67 7090.16,4005.67 U5.16@7090.16,3950.87
M6_AOUT1: ST12.1 U11.4 U11.5 | length 496.2
  Top Layer w10: U11.5@6814.13,4519.84 U11.4@6839.72,4519.84
  Top Layer w29.53: 6826.66,4519.87 6826.66,4617.17 7043.56,4834.07 ST12.1@7043.58,4900.67
M6_AOUT2: ST12.2 U11.6 U11.7 | length 436
  Top Layer w10: U11.7@6762.95,4519.84 U11.6@6788.54,4519.84
  Top Layer w29.53: 6775.26,4519.87 6775.26,4660.77 6846.76,4732.27 ST12.2@6846.76,4900.67
M6_BIN1: U5.14 U11.24 | length 601.8
  Top Layer w10: U11.24@6814.16,4291.47 6814.16,4201.67 6890.16,4125.67 7070.16,4125.67 7190.16,4005.67 U5.14@7190.16,3950.87
M6_BIN2: U5.12 U11.25 | length 670.7
  Top Layer w10: U11.25@6839.76,4291.47 6839.76,4211.07 6900.16,4150.67 7080.16,4150.67 7155.16,4075.67 7220.16,4075.67 7290.16,4005.67 U5.12@7290.16,3950.87
M6_BOUT1: ST11.2 U11.10 U11.11 | length 498.1
  Top Layer w10: U11.11@6660.59,4519.84 U11.10@6686.18,4519.84
  Top Layer w29.53: ST11.2@6451.76,4900.67 6451.76,4839.07 6673.06,4617.77 6673.06,4519.87
M6_BOUT2: ST11.1 U11.8 U11.9 | length 438.7
  Top Layer w10: U11.9@6711.77,4519.84 U11.8@6737.36,4519.84
  Top Layer w29.53: ST11.1@6648.58,4900.67 6648.56,4732.27 6725.16,4655.67 6725.16,4521.17 6723.76,4519.87
M6_DVDD: C45.1 R22.2 R24.2 U11.15 | length 364.5
  Top Layer w10: R22.2@6497.11,4195.67 6497.12,4269.59 R24.2@6500.16,4272.63 ; C45.1@6500.16,4430.12 6500.16,4425.67 6455.16,4380.67 6455.16,4317.63 R24.2@6500.16,4272.63 ; U11.15@6583.82,4291.5 6519.03,4291.5 R24.2@6500.16,4272.63
M6_NFAULT: R24.1 U11.16 | length 157.6
  Top Layer w10: R24.1@6500.16,4348.71 6502.16,4350.67 6590.16,4350.67 6609.36,4329.97 U11.16@6609.41,4291.5
M7_AIN1: U6.3 U13.22 | length 1110.7
  Top Layer w10: U6.3@5410.16,3578.39 5410.16,3635.67 5550.16,3775.67 5860.76,3775.67 5942.96,3857.87 U13.22@5942.95,4286.5
M7_AIN2: U6.5 U13.23 | length 1044.4
  Top Layer w10: U6.5@5510.16,3578.39 5510.16,3635.67 5630.16,3755.67 5880.16,3755.67 5968.56,3844.07 U13.23@5968.56,4286.47
M7_AOUT1: ST14.1 U13.4 U13.5 | length 513.5
  Top Layer w10: U13.5@5994.13,4514.84 U13.4@6019.72,4514.84
  Top Layer w29.53: 6007.06,4514.87 6007.06,4617.57 6253.56,4864.07 ST14.1@6253.58,4900.67
M7_AOUT2: ST14.2 U13.6 U13.7 | length 453.6
  Top Layer w10: U13.7@5942.95,4514.84 U13.6@5968.54,4514.84
  Top Layer w29.53: 5954.96,4514.87 5954.96,4685.47 6056.76,4787.27 ST14.2@6056.76,4900.67
M7_BIN1: U6.7 U13.24 | length 975.5
  Top Layer w10: U6.7@5610.16,3578.39 5610.16,3635.67 5710.16,3735.67 5895.16,3735.67 5994.16,3834.67 U13.24@5994.16,4286.47
M7_BIN2: U6.9 U13.25 | length 903.7
  Top Layer w10: U6.9@5710.16,3578.39 5710.16,3630.67 5795.16,3715.67 5910.16,3715.67 6019.76,3825.27 U13.25@6019.76,4286.47
M7_BOUT1: ST13.2 U13.10 U13.11 | length 490.9
  Top Layer w10: U13.11@5840.59,4514.84 U13.10@5866.18,4514.84
  Top Layer w29.53: ST13.2@5661.76,4900.67 5661.76,4804.07 5853.66,4612.17 5853.66,4514.87
M7_BOUT2: ST13.1 U13.8 U13.9 | length 430.6
  Top Layer w10: U13.9@5891.77,4514.84 U13.8@5917.36,4514.84
  Top Layer w29.53: ST13.1@5858.58,4900.67 5858.56,4697.27 5904.96,4650.87 5904.96,4514.87
M7_DVDD: C55.1 R28.2 R30.2 U13.15 | length 379.8
  Top Layer w10: R28.2@5677.11,4190.67 5680.16,4193.71 R30.2@5680.16,4272.63 ; C55.1@5680.16,4430.12 5625.16,4375.12 5625.16,4320.67 5673.2,4272.63 R30.2@5680.16,4272.63 ; U13.15@5763.82,4286.5 5749.95,4272.63 R30.2@5680.16,4272.63
M7_NFAULT: R30.1 U13.16 | length 159.6
  Top Layer w10: R30.1@5680.16,4348.71 5682.16,4350.67 5765.16,4350.67 5789.36,4324.97 U13.16@5789.41,4286.5
M8_AIN1: U6.18 U15.22 | length 507.4
  Top Layer w10: U15.22@5152.95,4281.5 5152.96,4147.87 5240.16,4060.67 5360.16,4060.67 5410.16,4010.67 U6.18@5410.16,3950.87
M8_AIN2: U6.16 U15.23 | length 576.3
  Top Layer w10: U15.23@5178.56,4281.47 5178.56,4157.27 5250.16,4085.67 5435.16,4085.67 5510.16,4010.67 U6.16@5510.16,3950.87
M8_AOUT1: ST16.1 U15.4 U15.5 | length 518.7
  Top Layer w10: U15.5@5204.13,4509.84 U15.4@5229.72,4509.84
  Top Layer w29.53: 5216.66,4509.87 5216.66,4632.17 5463.56,4879.07 ST16.1@5463.58,4900.67
M8_AOUT2: ST16.2 U15.6 U15.7 | length 458.1
  Top Layer w10: U15.7@5152.95,4509.84 U15.6@5178.54,4509.84
  Top Layer w29.53: 5165.96,4509.87 5165.96,4673.27 5266.76,4774.07 ST16.2@5266.76,4900.67
M8_BIN1: U6.14 U15.24 | length 639.4
  Top Layer w10: U15.24@5204.16,4281.47 5204.16,4171.67 5270.16,4105.67 5510.16,4105.67 5610.16,4005.67 U6.14@5610.16,3950.87
M8_BIN2: U6.12 U15.25 | length 708.3
  Top Layer w10: U15.25@5229.76,4281.47 5229.76,4181.07 5280.16,4130.67 5585.16,4130.67 5710.16,4005.67 U6.12@5710.16,3950.87
M8_BOUT1: ST15.2 U15.10 U15.11 | length 495.6
  Top Layer w10: U15.11@5050.59,4509.84 U15.10@5076.18,4509.84
  Top Layer w29.53: ST15.2@4871.76,4900.67 4871.76,4802.27 5062.96,4611.07 5062.96,4509.87
M8_BOUT2: ST15.1 U15.8 U15.9 | length 435.4
  Top Layer w10: U15.9@5101.77,4509.84 U15.8@5127.36,4509.84
  Top Layer w29.53: ST15.1@5068.58,4900.67 5068.56,4697.27 5114.46,4651.37 5114.46,4509.87
M8_DVDD: C65.1 R34.2 R36.2 U15.15 | length 391.1
  Top Layer w10: C65.1@4870.16,4435.17 4820.16,4385.17 4820.16,4320.67 4863.16,4277.67 R36.2@4870.16,4277.67 ; R34.2@4872.11,4195.67 4870.16,4197.63 R36.2@4870.16,4277.63 ; U15.15@4973.82,4281.5 4874.03,4281.5 R36.2@4870.16,4277.63
M8_NFAULT: R36.1 U15.16 | length 190
  Top Layer w10: R36.1@4870.16,4353.71 4872.12,4355.67 4975.16,4355.67 4999.41,4331.42 U15.16@4999.41,4281.5
R4_2: C66.2 R4.2 SW1.1 U16.11 | length 1318.8
  Top Layer w10: SW1.1@2154.76,2955.67 2199.76,3000.67 C66.2@2244.61,3000.67 2323.2,2922.08 R4.2@2323.2,2910.67 ; R4.2@2323.2,2910.67 2580.16,2910.67 2640.16,2970.67 v1(2640.16,3060.67) ; v1(2775.16,3060.67) 2845.16,3060.67 2940.16,3155.67 3140.16,3155.67 3178.26,3193.77 U16.11@3240.96,3193.77
  Bottom Layer w10: v1(2640.16,3060.67) v1(2775.16,3060.67)
R9_2: JTAG.13 R9.2 | length 351.4
  Top Layer w10: R9.2@3274.07,4660.67 3227.12,4707.63 3227.12,4890.67 3292.12,4955.67 JTAG.13@3302.12,4955.67
R10_1: LED6.1 R10.1 | length 85.6
  Top Layer w10: LED6.1@1991.51,4090.67 R10.1@2077.11,4090.67
R12_2: JTAG.14 R12.2 | length 116.6
  Top Layer w10: R12.2@3274.07,4750.67 3274.12,4827.67 JTAG.14@3302.12,4855.67
R13_1: LED8.1 R13.1 | length 90.6
  Top Layer w10: LED8.1@1991.51,4190.67 R13.1@2082.11,4190.67
R19_2: R15.1 R19.2 U8.17 U8.18 | length 196.2
  Top Layer w10: U8.18@7599.72,2289.84 U8.17@7625.31,2289.84 7623.2,2291.96 R19.2@7623.2,2385.67 R15.1@7697.11,2385.67
R26_2: R22.1 R26.2 U11.17 U11.18 | length 200.9
  Top Layer w10: R22.1@6573.2,4195.67 R26.2@6647.11,4195.67 ; U11.17@6635,4291.5 U11.18@6660.59,4291.5 ; R26.2@6647.16,4195.67 6647.16,4232.67 6660.56,4246.07 U11.18@6660.59,4291.5
R32_2: R28.1 R32.2 U13.17 U13.18 | length 200.4
  Top Layer w10: R28.1@5753.2,4190.67 R32.2@5827.11,4190.67 5815,4202.79 U13.17@5815,4286.5 U13.18@5840.59,4286.5
R37_2: R33.1 R37.2 U14.17 U14.18 | length 223.1
  Top Layer w10: U14.18@5239.72,2284.84 U14.17@5265.31,2284.84 ; U14.17@5265.36,2284.87 5265.36,2405.67 R37.2@5268.2,2405.67 ; R37.2@5268.2,2405.67 R33.1@5342.11,2405.67
S$1126: 
TCK: JTAG.9 JTAG.11 U16.67 | length 2389.6
  Top Layer w10: JTAG.11@3402.12,4955.67 JTAG.9@3502.12,4955.67 ; U16.67@3837.4,3234.41 3973.9,3234.41 v1(3985.16,3245.67)
  Bottom Layer w10: JTAG.9@3502.16,4955.67 3550.16,4907.67 3550.16,4820.67 3595.16,4775.67 3825.16,4775.67 3895.16,4705.67 3895.16,3425.67 3840.16,3370.67 3840.16,3310.67 3905.16,3245.67 v1(3985.16,3245.67)
TDI: JTAG.3 U16.71 | length 1927.8
  Top Layer w10: U16.71@3837.4,3313.15 3917.64,3313.15 v1(3950.16,3345.67)
  Bottom Layer w10: JTAG.3@3802.16,4955.67 3805.16,4955.67 3855.16,4905.67 3855.16,4815.67 3945.16,4725.67 3945.16,3415.67 3880.16,3350.67 3880.16,3330.67 3895.16,3315.67 3920.16,3315.67 v1(3950.16,3345.67)
TDO: JTAG.7 U16.70 | length 2101.8
  Top Layer w10: U16.70@3837.4,3293.47 3932.96,3293.47 v1(3945.16,3305.67)
  Bottom Layer w10: JTAG.7@3602.16,4955.67 3650.16,4907.67 3650.16,4820.67 3675.16,4795.67 3835.16,4795.67 3920.16,4710.67 3920.16,3420.67 3860.16,3360.67 3860.16,3320.67 3890.16,3290.67 3930.16,3290.67 v1(3945.16,3305.67)
TMS: JTAG.1 U16.72 | length 1751.6
  Top Layer w10: U16.72@3837.4,3332.84 3897.33,3332.84 v1(3910.16,3345.67)
  Bottom Layer w10: JTAG.1@3902.16,4955.67 3920.16,4955.67 3970.16,4905.67 3970.16,3405.67 v1(3910.16,3345.67)
TRST: JTAG.2 R6.2 U16.12 | length 2979.9
  Top Layer w10: v1(3180.16,3160.67) 3193.61,3174.13 U16.12@3240.91,3174.13 ; v1(3870.16,4685.67) 3930.16,4745.67 R6.2@3930.16,4750.67 3930.16,4827.63 JTAG.2@3902.12,4855.67
  Bottom Layer w10: v1(3180.16,3160.67) 3180.16,3170.67 3140.16,3210.67 3105.16,3210.67 3086.16,3191.67 2994.16,3191.67 2925.16,3260.67 2925.16,3395.67 3135.16,3605.67 3470.16,3605.67 3585.16,3490.67 3835.16,3490.67 3870.16,3525.67 v1(3870.16,4685.67)
U2_1: LED2.1 U2.1 U2.2 | length 189.6
  Top Layer w10: LED2.1@1981.51,3130.67 2020.01,3169.17 U2.1@2105.16,3169.17 U2.2@2155.16,3169.17
U2_7: LED1.1 U2.6 U2.7 | length 290.8
  Top Layer w10: LED1.1@1981.51,3405.67 2016.51,3440.67 2145.16,3440.67 2155.16,3430.67 U2.7@2155.16,3382.17 U2.6@2205.16,3382.17
U2_8: C1.2 R1.2 U2.8 | length 364.6
  Top Layer w10: U2.8@2105.16,3382.17 2105.16,3362.63 2150.16,3317.63 R1.2@2350.16,3317.63 C1.2@2350.16,3236.22
U7_7: R10.2 U7.7 | length 757
  Top Layer w10: R10.2@2153.2,4090.67 2160.16,4090.67 2275.16,4205.67 2500.16,4205.67 2720.16,3985.67 U7.7@2771.38,3985.67
U7_9: R13.2 U7.9 | length 694
  Top Layer w10: R13.2@2158.2,4190.67 2195.16,4190.67 2240.16,4235.67 2570.16,4235.67 2720.16,4085.67 U7.9@2771.38,4085.67
U7_12: R14.2 U7.12 | length 285.1
  Top Layer w10: R14.2@2153.2,3990.67 2248.2,4085.67 U7.12@2398.94,4085.67
U7_14: R11.2 U7.14 | length 285.5
  Top Layer w10: R11.2@2153.2,3889.67 2249.2,3985.67 U7.14@2398.94,3985.67
U7_16: R8.2 U7.16 | length 285.1
  Top Layer w10: R8.2@2153.2,3790.67 2248.2,3885.67 U7.16@2398.94,3885.67
U7_18: R7.2 U7.18 | length 285.1
  Top Layer w10: R7.2@2153.2,3690.67 2248.2,3785.67 U7.18@2398.94,3785.67
U9_1: C29.2 U9.1 | length 151.6
  Top Layer w10: U9.1@7676.46,4524.87 7676.46,4479.37 7705.16,4450.67 7765.16,4450.67 C29.2@7765.16,4445.17
U9_18: R16.1 R20.2 U9.17 U9.18 | length 205.1
  Top Layer w10: R16.1@7323.2,4200.67 R20.2@7397.11,4200.67 7420.59,4224.14 U9.18@7420.59,4296.5 U9.17@7395,4296.5
U9_27: C28.2 U9.27 | length 177
  Top Layer w10: U9.27@7650.96,4296.47 7650.96,4334.97 7686.66,4370.67 7765.16,4370.67 C28.2@7765.16,4361.17
U9_28: C28.1 U9.28 | length 101.6
  Top Layer w10: U9.28@7676.49,4296.5 7682.36,4290.67 7765.16,4290.67 C28.1@7765.16,4280.17
U10_1: C37.2 U10.1 | length 143.2
  Top Layer w10: C37.2@6500.16,2131.22 6560.16,2130.67 6593.86,2096.97 U10.1@6593.86,2061.47
U10_18: R21.1 R25.2 U10.17 U10.18 | length 201.2
  Top Layer w10: U10.18@6849.72,2289.84 U10.17@6875.31,2289.84 6875.32,2388.55 R25.2@6873.2,2390.67 R21.1@6947.11,2390.67
U10_27: C36.2 U10.27 | length 172.9
  Top Layer w10: C36.2@6500.16,2215.17 6585.16,2215.67 6619.36,2251.37 U10.27@6619.36,2289.87
U10_28: C36.1 U10.28 | length 96.3
  Top Layer w10: C36.1@6500.16,2296.22 6506.54,2289.84 U10.28@6593.82,2289.84
U12_1: C47.2 U12.1 | length 143.2
  Top Layer w10: C47.2@5680.16,2126.22 5740.16,2125.67 5773.86,2091.97 U12.1@5773.86,2056.47
U12_18: R27.1 R31.2 U12.17 U12.18 | length 221.2
  Top Layer w10: U12.18@6029.72,2284.84 U12.17@6055.31,2284.84 6055.32,2403.55 R31.2@6053.2,2405.67
  Top Layer w19.68: R31.2@6053.2,2405.67 R27.1@6127.11,2405.67
U12_27: C46.2 U12.27 | length 172.9
  Top Layer w10: C46.2@5680.16,2210.17 5765.16,2210.67 5799.36,2246.37 U12.27@5799.36,2284.87
U12_28: C46.1 U12.28 | length 96.3
  Top Layer w10: C46.1@5680.16,2291.22 5686.54,2284.84 U12.28@5773.82,2284.84
U15_1: C59.2 U15.1 | length 131.3
  Top Layer w10: U15.1@5306.46,4509.87 5306.46,4479.37 5335.76,4450.17 C59.2@5395.16,4450.17
U15_18: R34.1 R38.2 U15.17 U15.18 | length 188.1
  Top Layer w10: R34.1@4948.2,4195.67 R38.2@5022.11,4195.67 ; R38.2@5022.16,4195.67 5024.96,4195.67 U15.17@5025,4281.5 ; U15.17@5025,4281.5 U15.18@5050.59,4281.5
U15_27: C58.2 U15.27 | length 173.6
  Top Layer w10: U15.27@5280.9,4281.5 5280.91,4326.42 5315.71,4361.22 C58.2@5395.16,4361.22
U15_28: C58.1 U15.28 | length 89.2
  Top Layer w10: U15.28@5306.49,4281.5 5307.88,4280.12 C58.1@5395.16,4280.12
U16_3: C6.2 U16.3 | length 349.8
  Top Layer w10: C6.2@2915.76,3410.67 2940.16,3410.67 2999.56,3351.27 U16.3@3240.96,3351.27
U16_14: C7.2 U16.14 | length 473.6
  Top Layer w10: C7.2@2829.61,2990.67 2974.96,3135.97 U16.14@3242.96,3135.97
U16_37: C8.2 U16.37 | length 362.1
  Top Layer w10: U16.37@3520.48,2858.43 3520.48,2680.35 3639.61,2561.22 C8.2@3655.16,2561.22
U16_63: C9.1 U16.63 | length 260.5
  Top Layer w10: U16.63@3837.4,3155.67 4069.61,3155.67 C9.1@4089.61,3175.67
U16_81: C10.1 U16.81 | length 276.5
  Top Layer w10: U16.81@3677.96,3452.91 3677.96,3548.47 3700.16,3570.67 3700.16,3705.17 C10.1@3685.16,3705.17
U16_91: C11.1 U16.91 | length 503.4
  Top Layer w10: U16.91@3481.1,3452.91 3481.1,3901.06 C11.1@3520.16,3940.12
USB_DN: U16.77 USB1.2 | length 2692.4
  Top Layer w10: U16.77@3756.7,3452.91 3756.7,3487.21 v1(3795.16,3525.67)
  Bottom Layer w10: USB1.2@2083.76,2429.87 2329.56,2675.67 2510.16,2675.67 2560.16,2725.67 2560.16,3325.67 2700.16,3465.67 2960.16,3465.67 3125.16,3630.67 3495.16,3630.67 3600.16,3525.67 v1(3795.16,3525.67)
USB_DP: U16.78 USB1.3 | length 2826.5
  Top Layer w10: U16.78@3737.01,3452.91 3737.01,3512.52 v1(3795.16,3570.67)
  Bottom Layer w10: USB1.3@2005,2429.88 2275.76,2700.67 2500.16,2700.67 2535.16,2735.67 2535.16,3335.67 2690.16,3490.67 2950.16,3490.67 3110.16,3650.67 3535.16,3650.67 3620.16,3565.67 3790.16,3565.67 v1(3795.16,3570.67)
VMM: C27.1 C29.1 C30.1 C31.1 C32.1 C33.1 C37.1 C39.1 C40.1 C41.1 C42.1 C43.1 C47.1 C49.1 C50.1 C51.1 C52.1 C53.1 C57.1 C59.1 C60.1 C61.1 C62.1 C63.1 pad.41 pad.43 ST17.1 U8.2 U8.13 U9.2 U9.13 U10.2 U10.13 U11.2 U11.13 U12.2 U12.13 U13.2 U13.13 U14.2 U14.13 U15.2 U15.13 | length 17517.1
  Top Layer w10: v1(4870.16,4680.67) 4885.16,4680.67 4999.4,4566.42 U15.13@4999.41,4509.84 ; C62.1@4889.6,1960.67 C57.1@4890.16,2045.17 ; C62.1@4889.6,1960.67 4900.16,1960.67 4945.16,2005.67 4990.16,2005.67 5009.41,2024.92 U14.2@5009.41,2056.5 ; U15.2@5280.9,4509.84 5280.91,4541.42 5300.16,4560.67 5345.16,4560.67 5390.71,4606.22 C61.1@5390.71,4615.67 5395.16,4611.22 C59.1@5395.16,4531.22 ; U14.13@5290.9,2056.5 5290.91,2014.91 5405.15,1900.67 v1(5410.16,1900.67) ; C47.1@5680.16,2045.17 C52.1@5679.6,1960.67 5685.16,1960.67 5730.16,2005.67 5785.16,2005.67 5799.36,2019.87 U12.2@5799.41,2056.5 ; C53.1@5680.16,4676.22 5789.41,4566.97 U13.13@5789.41,4514.84 ; U13.2@6070.96,4514.87 6070.96,4551.47 6085.16,4565.67 6135.16,4565.67 6180.16,4610.67 6185.76,4610.67 C49.1@6185.16,4526.22 ; U12.13@6080.9,2056.5 6080.91,2009.92 6185.16,1905.67 v1(6200.16,1905.67) ; C37.1@6500.16,2050.12 6504.61,2045.67 C40.1@6504.6,1965.67 6504.6,1896.22 v1(6505.16,1895.67) ; v1(6500.16,4676.17) 6524.66,4676.17 6609.36,4591.47 U11.13@6609.36,4519.87 ; C40.1@6504.6,1965.67 6549.56,2010.67 6605.16,2010.67 6619.36,2024.97 U10.2@6619.41,2061.5 ; U11.2@6890.96,4519.87 6890.96,4551.37 6905.16,4565.67 6960.16,4565.67 7005.76,4610.67 C39.1@7005.16,4526.22 ; U10.13@6900.9,2061.5 6900.91,2014.37 C42.1@7020.16,1895.12 ; v1(7005.16,4675.67) 7005.16,4611.22 C43.1@7005.71,4610.67 ; C27.1@7250.16,2050.12 7254.61,2045.67 C32.1@7254.6,1965.67 7254.6,1896.22 v1(7255.16,1895.67) ; v1(7250.16,4676.17) 7284.66,4676.17 7369.36,4591.37 U9.13@7369.36,4524.87 ; C32.1@7254.6,1965.67 7299.56,2010.67 7355.16,2010.67 7369.36,2024.87 U8.2@7369.41,2061.5 ; U8.13@7650.9,2061.5 7650.91,2014.37 C30.1@7770.16,1895.12 ; U9.2@7650.96,4524.87 7650.96,4561.47 7665.16,4575.67 7725.76,4575.67 7765.76,4615.67 C29.1@7765.16,4536.22 ; v1(7765.16,4675.67) 7765.16,4616.22 C31.1@7765.71,4615.67
  Top Layer w19.68: C52.1@5679.6,1960.67 5680.16,1960.12 v1(5680.16,1900.67)
  Top Layer w29.53: v1(5390.16,4680.67) 5390.16,4616.22 C61.1@5390.71,4615.67 ; v1(5970.16,3545.67) 5970.16,3515.67 6180.16,3305.67 pad.43@6300.16,3305.67 pad.41@6400.16,3305.67 7846.73,3305.67 ST17.1@7895.16,3257.24 ; v1(6100.16,2690.67) v1(6100.16,2940.67) ; v1(6165.16,4680.67) 6185.71,4660.12 C51.1@6185.71,4610.67
  Bottom Layer w29.53: v1(4870.16,4680.67) v1(5681.09,4680.67) v1(6165.16,4680.67) 6250.16,4595.67 6250.16,4365.67 5970.16,4085.67 v1(5970.16,3545.67) ; v1(4885.16,1960.67) 4885.16,1935.67 4920.16,1900.67 v1(5410.16,1900.67) 6015.16,1900.67 ; v1(6100.16,2690.67) 6100.16,2395.67 6095.16,2390.67 6095.16,1980.67 6015.16,1900.67 ; v1(6100.16,2940.67) 6100.16,3105.67 pad.43@6300.16,3305.67 ; v1(6200.16,1905.67) 6200.16,1900.67 6015.16,1900.67 ; v1(6500.16,4676.17) 6500.66,4675.67 v1(7005.16,4675.67) 7815.16,4675.67 8000.16,4490.67 8000.16,3192.27 7980.16,3172.27
  Bottom Layer w39.37: v1(6505.16,1895.67) v1(7255.16,1895.67) 7870.16,1895.67 7980.16,2005.67 7980.16,3172.27 ST17.1@7895.16,3257.27
  other v1: 7020.16,1895.67 7770.16,1895.67
pads on no net: U7.3 U7.5 U7.15 U7.17 U16.45 U16.59

## Keep-outs
Keep-Out Layer:
  lines w10: 1800.16,1605.67 ccw(c1900.16,1605.67) 1900.16,1505.67 ; 1800.16,4948.97 cw(c1900.16,4948.97) 1900.16,5048.97 ; 4450.16,1505.67 ccw(c4450.16,1605.67) 4550.16,1605.67 ccw(c4650.16,1605.67) 4650.16,1505.67 ; 4450.16,5050.67 cw(c4450.16,4950.67) 4550.16,4950.67 cw(c4650.16,4950.67) 4650.16,5050.67 ; 6255.16,1505.67 ccw(c6255.16,1605.67) 6355.16,1605.67 ccw(c6455.16,1605.67) 6455.16,1505.67 ; 6255.16,5050.67 cw(c6255.16,4950.67) 6355.16,4950.67 cw(c6455.16,4950.67) 6455.16,5050.67 ; 7999.36,1505.67 ccw(c7999.36,1605.67) 8099.36,1605.67 ; 7999.36,5048.97 cw(c7999.36,4948.97) 8099.36,4948.97

## Silkscreen, mask and mechanical layers (free items; w line width, h text height)
Top Overlay:
  text "d0ngy3" at 1870.16,1671.46 h98.42